# Altium PCB Controller.PcbDoc
Units mm, origin at the board's own origin, x right, y up, seen from the top; angles counter-clockwise.
Board outline 152.4 x 101.6 mm, 2 copper layers (Top Layer, Bottom Layer); 32 components, 49 nets, 164 pads, 0 vias.
Unrouted connection lines stored in the file: 99.
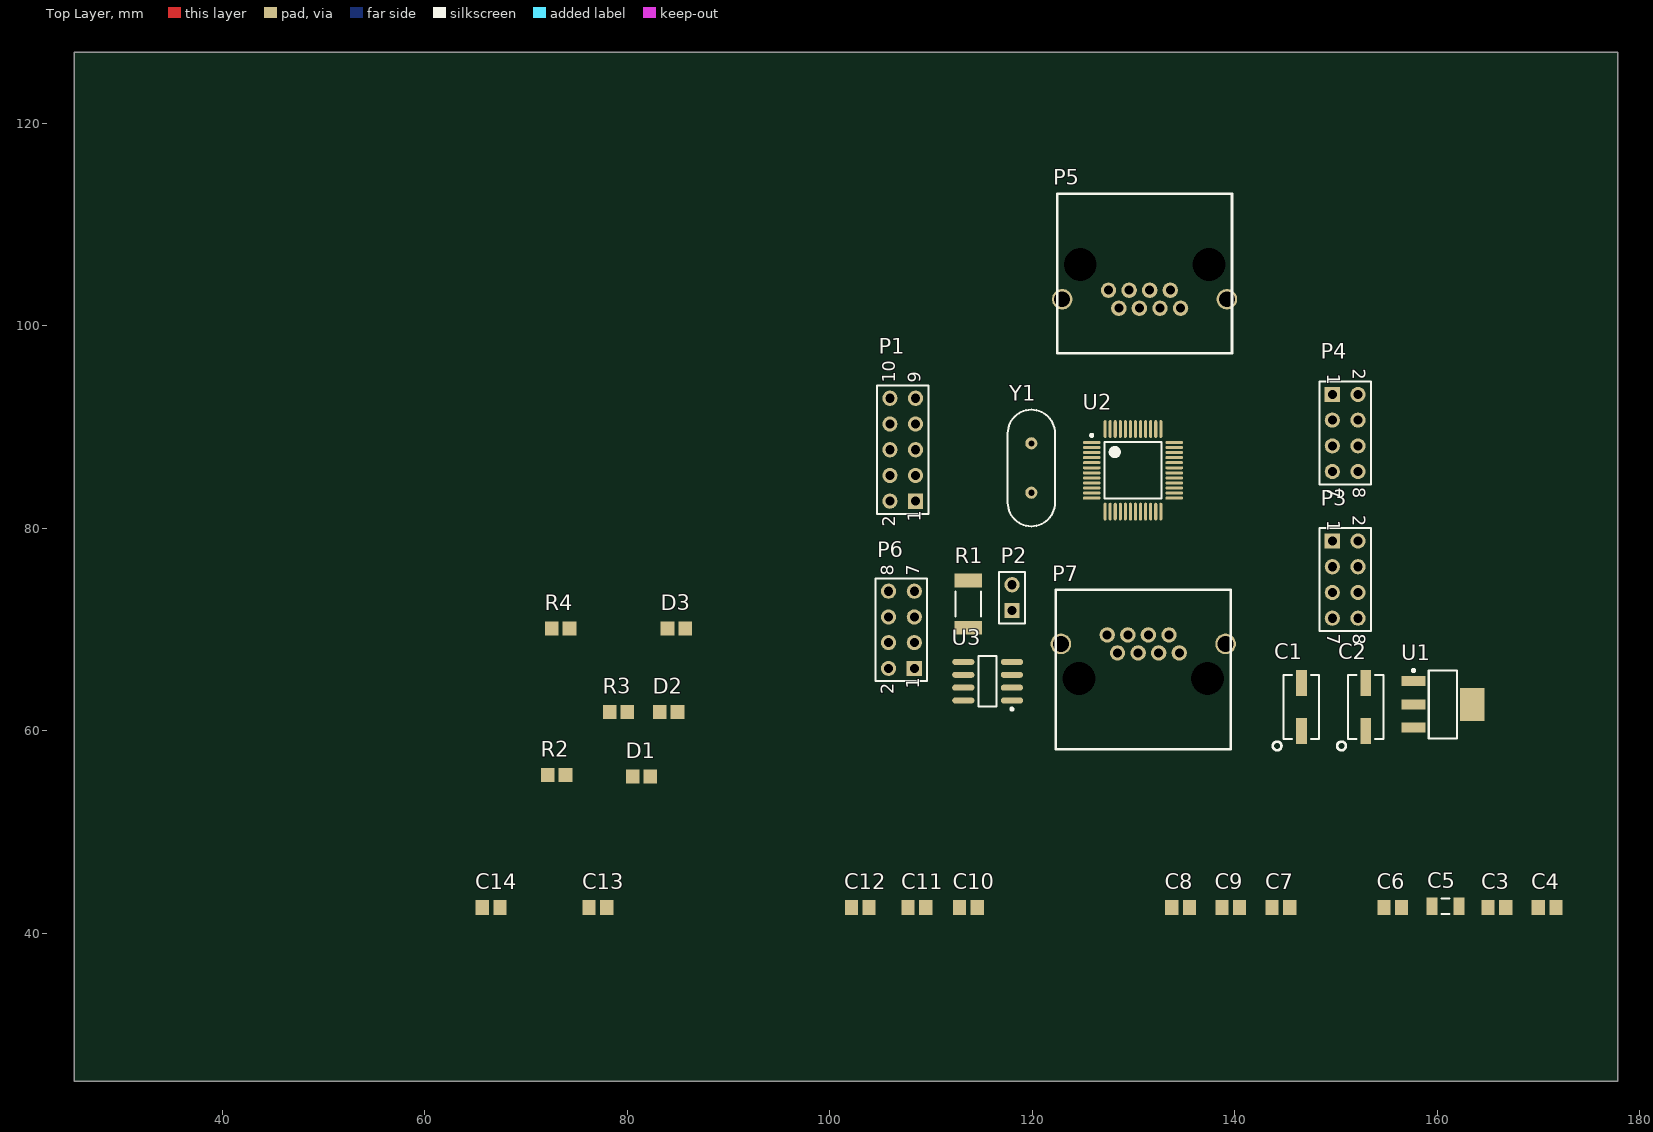
[diagram p0: Top Layer view]
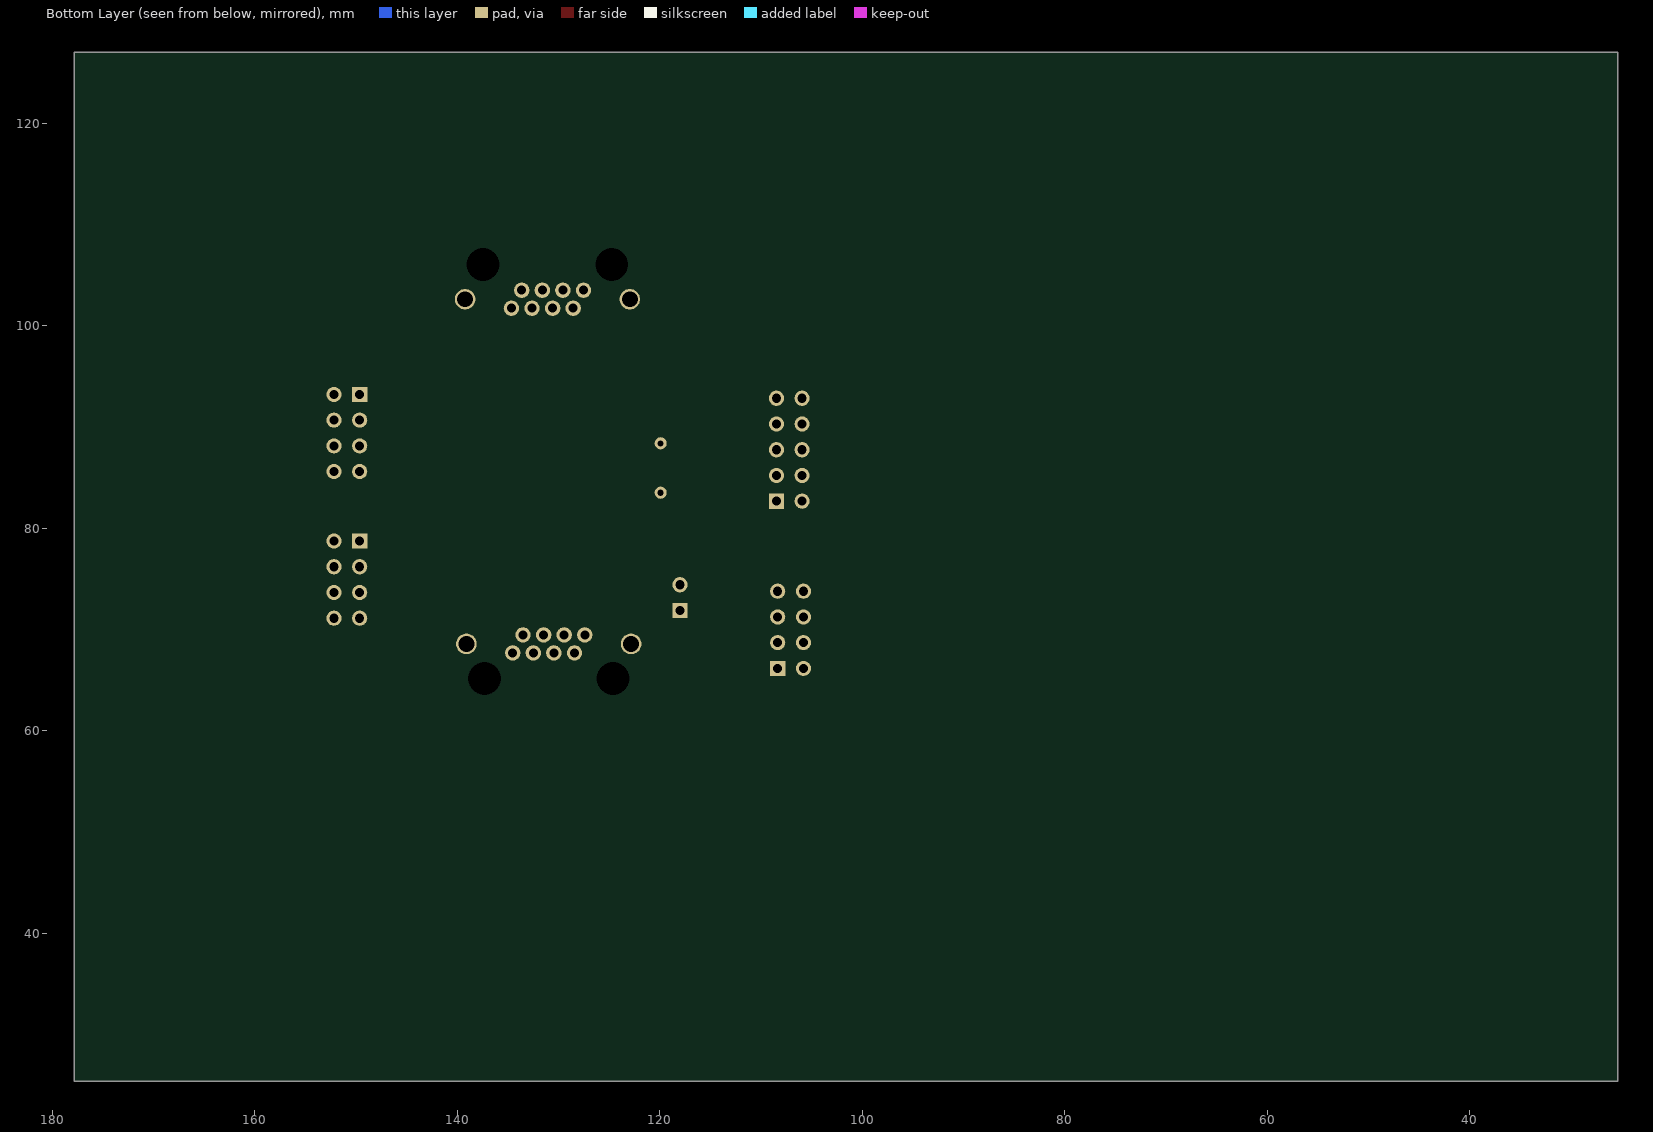
[diagram p1: Bottom Layer view, seen from below]

## Layer stack, top to bottom
Top Layer: signal copper 0.0356
Dielectric: dielectric 0.32, FR-4, Dk 4.8
Bottom Layer: signal copper 0.0356

## Board outline
25.4,25.4 177.8,25.4 177.8,127 25.4,127

## Design rules (kind name [scope] priority, off if disabled: settings)
Clearance [All] p1: gap=0.254
PolygonConnect [All] p1: connectstyle=Relief reliefconductorwidth=0.254 reliefentries=4 polygonreliefangle="90 Angle" airgapwidth=0.254
RoutingVias [All] p1: holewidth=0.711 width=1.27 viastyle="Through Hole" minholewidth=0.711 minwidth=1.27 maxholewidth=0.711 maxwidth=1.27
SolderMaskExpansion [All] p1: expansion=0.102
Width [All] p1: maxlimit=0.254 minlimit=0.254 preferedwidth=0.254
28 further rules are at their usual default settings.

## Components (designator, comment, footprint, x,y, rotation, side; value= is the part's Value field where it differs from the comment)
C1 "Cap Pol3" CAPM6032X28N 146.572,62.357 r90 top
C2 "Cap Pol3" CAPM6032X28N 152.922,62.357 r90 top
C3 "Cap Semi" CAPC2012X14N 165.876,42.545 r0 top
C4 "Cap Semi" CAPC2012X14N 170.829,42.545 r0 top
C5 "Cap Semi" C1206 160.796,42.672 r0 top
C6 "Cap Semi" CAPC2012X14N 155.589,42.545 r0 top
C7 "Cap Semi" CAPC2012X14N 144.54,42.545 r0 top
C8 "Cap Semi" CAPC2012X14N 134.634,42.545 r0 top
C9 "Cap Semi" CAPC2012X14N 139.587,42.545 r0 top
C10 "Cap Semi" CAPC2012X14N 113.679,42.545 r0 top
C11 "Cap Semi" CAPC2012X14N 108.599,42.545 r0 top
C12 "Cap Semi" CAPC2012X14N 103.011,42.545 r0 top
C13 "Cap Semi" CAPC2012X14N 77.103,42.545 r0 top
C14 "Cap Semi" CAPC2012X14N 66.562,42.545 r0 top
D1 "LED3" RESC2012X14N 81.407,55.499 r0 top
D2 "LED3" RESC2012X14N 84.088,61.849 r0 top
D3 "LED3" RESC2012X14N 84.85,70.104 r0 top
P1 "Header 5X2" HDR2X5 108.472,82.677 r90 top
P2 "CAN_TERM" HDR1X2 117.997,71.882 r90 top
P3 "Header 4X2" HDR2X4 149.62,78.74 r270 top
P4 "Header 4X2" HDR2X4 149.62,93.218 r270 top
P5 "RJ45-CAN8" RJ45-CAN 131.205,105.156 r180 top
P6 "Header 4X2" HDR2X4 108.345,66.167 r90 top
P7 "RJ45-CAN8" RJ45-CAN 130.824,66.04 r0 top
R1 "Res3" RESC5025X07N 113.679,72.517 r90 top
R2 "Res3" RESC2012X14N 73.025,55.626 r0 top
R3 "Res3" RESC2012X14N 79.135,61.849 r0 top
R4 "Res3" RESC2012X14N 73.42,70.104 r0 top
U1 "LD1117S33" SOT230P700X180-4N 160.542,62.611 r0 top
U2 "STM32F303" TSQFP50P900X900X160-48N 129.935,85.725 r0 top
U3 "SN65HVD230DR" SOIC127P600X175-8N 115.584,64.897 r180 top
Y1 "XTAL" HC49/US 119.902,88.392 r270 top

## Footprints (in the part's own frame and the unit in brackets; to place one, negate y for a bottom-side part, rotate by r counter-clockwise, add the part's x,y. Pads: shape width x height; smd on the part's side, far side on the other; paste and mask are expansions set on the pad)
C1206 [mm] "Chip Capacitor, Body 3.2x1.6mm, IPC High Density"
  rect 1.1x1.7 smd: 1(-1.35,0) 2(1.35,0)
  silkscreen extent -0.4,-0.75 0.4,0.75, body extent -1.7,-0.9 1.7,0.9, height 1.3
CAPC2012X14N [mm] "Chip Capacitor, 2-Leads, Body 2.00x1.25mm, IPC Medium Density"
  rect 1.3x1.5 smd: 1(-0.875,0) 2(0.875,0)
  body extent -1.1,-0.72 1.1,0.72, height 1.4
CAPM6032X28N [mm] "Molded Capacitor, 2-Leads, Body 6.00x3.20mm, IPC Medium Density"
  rect 2.55x1.05 smd: 1(-2.375,0) 2(2.375,0)
  silkscreen extent -4.28,-1.75 3.15,2.83, body extent -3.15,-1.75 3.15,1.75, height 2.8
HC49/US [mm]
  round 1.2 hole 0.6: 1(0,0) 2(4.88,0)
  silkscreen extent -3.32,-2.33 8.2,2.33
HDR1X2 [mm] "Connector; Header; 2 Position"
  rect 1.5x1.5 hole 0.9: 1(0,0)
  round 1.5 hole 0.9: 2(2.54,0)
  silkscreen extent -1.27,-1.27 3.81,1.27
HDR2X4 [mm] "Connector; Header; 4x2 Position"
  rect 1.5x1.5 hole 0.9: 1(0,0)
  round 1.5 hole 0.9: 2(0,2.54) 3(2.54,0) 4(2.54,2.54) 5(5.08,0) 6(5.08,2.54) 7(7.62,0) 8(7.62,2.54)
  silkscreen extent -1.27,-1.27 8.89,3.81
HDR2X5 [mm] "Connector; Header; 5x2 Position"
  rect 1.5x1.5 hole 0.9: 1(0,0)
  round 1.5 hole 0.9: 2(0,2.54) 3(2.54,0) 4(2.54,2.54) 5(5.08,0) 6(5.08,2.54) 7(7.62,0) 8(7.62,2.54) 9(10.16,0) 10(10.16,2.54)
  silkscreen extent -1.27,-1.27 11.43,3.81
RESC2012X14N [mm] "Chip Resistor, 2-Leads, Body 2.00x1.25mm, IPC Medium Density"
  rect 1.35x1.4 smd: 1(-0.875,0) 2(0.875,0)
  body extent -1.1,-0.72 1.1,0.73, height 1.4
RESC5025X07N [mm] "Chip Resistor, 2-Leads, Body 5.00x2.50mm, IPC Medium Density"
  rect 1.35x2.7 smd: 1(-2.325,0) 2(2.325,0)
  silkscreen extent -1.25,-1.25 1.25,1.25, body extent -2.57,-1.33 2.58,1.32, height 0.7
RJ45-CAN [mil]
  round 60 hole 35: 1(145,65) 2(105,135) 3(65,65) 4(25,135) 5(-15,65) 6(-55,135) 7(-95,65) 8(-135,135)
  round 80 hole 62: 9(-315,100) 9(325,100)
  round 0 hole 128: 10(-245,-35)
  round 0 hole 128 unplated: 10(255,-35)
  silkscreen extent -335,-310 345,310
SOIC127P600X175-8N [mm] "SOIC, 8-Leads, Body 4.90x3.90mm, Pitch 1.27mm, IPC Medium Density"
  oval 2.2x0.6 smd: 1(-2.4,1.905) 2(-2.4,0.635) 3(-2.4,-0.635) 4(-2.4,-1.905) 5(2.4,-1.905) 6(2.4,-0.635) 7(2.4,0.635) 8(2.4,1.905)
  silkscreen extent -2.53,-2.5 0.9,2.88, body extent -2,-2.5 2,2.5, height 1.75
SOT230P700X180-4N [mm] "SOT223, 4-Leads, Body 6.50x7.00mm (avg), Pitch 2.30mm, IPC Medium Density"
  rect 2.4x1 smd: 1(-2.9,2.3) 2(-2.9,0) 3(-2.9,-2.3)
  rect 2.4x3.25 smd: 2(2.9,0)
  silkscreen extent -3.02,-3.35 1.4,3.47, body extent -1.85,-3.35 1.85,3.35, height 1.8
TSQFP50P900X900X160-48N [mm] "TSQFP, 48-Leads, Body 7.00x7.00mm, Pitch 0.50mm, IPC Medium Density"
  oval 1.75x0.3 smd: 1(-4.075,2.75) 2(-4.075,2.25) 3(-4.075,1.75) 4(-4.075,1.25) 5(-4.075,0.75) 6(-4.075,0.25) 7(-4.075,-0.25) 8(-4.075,-0.75) 9(-4.075,-1.25) 10(-4.075,-1.75) 11(-4.075,-2.25) 12(-4.075,-2.75) 25(4.075,-2.75) 26(4.075,-2.25) 27(4.075,-1.75) 28(4.075,-1.25) 29(4.075,-0.75) 30(4.075,-0.25) 31(4.075,0.25) 32(4.075,0.75) 33(4.075,1.25) 34(4.075,1.75) 35(4.075,2.25) 36(4.075,2.75)
  oval 0.3x1.75 smd: 13(-2.75,-4.075) 14(-2.25,-4.075) 15(-1.75,-4.075) 16(-1.25,-4.075) 17(-0.75,-4.075) 18(-0.25,-4.075) 19(0.25,-4.075) 20(0.75,-4.075) 21(1.25,-4.075) 22(1.75,-4.075) 23(2.25,-4.075) 24(2.75,-4.075) 37(2.75,4.075) 38(2.25,4.075) 39(1.75,4.075) 40(1.25,4.075) 41(0.75,4.075) 42(0.25,4.075) 43(-0.25,4.075) 44(-0.75,4.075) 45(-1.25,4.075) 46(-1.75,4.075) 47(-2.25,4.075) 48(-2.75,4.075)
  silkscreen extent -4.2,-2.8 2.8,3.57, body extent -3.5,-3.5 3.5,3.5, height 1.6

## Part data
C1 C2: "Polarized Capacitor (Surface Mount)"
C3 C4 C5 C6 C7 C8 C9 C10 C11 C12 C13 C14: "Capacitor (Semiconductor SIM Model)"
D1 D2 D3: "Typical BLUE SiC LED"
P1: "Header, 5-Pin, Dual row"
P2: library part "Header 2", "Header, 2-Pin"
P3 P4 P6: "Header, 4-Pin, Dual row"
R1 R2 R3 R4: "Resistor"
Y1: "Crystal Oscillator"

## Nets (pads, with @x,y where several pads share a name; then routed paths per layer and width w, separated by ;. In a path a pad name is that pad's centre, name@x,y a point inside that pad or via, vN(x,y) a via of type N, cw(c..) or ccw(c..) an arc to the next point about the centre after c; other vN are vias at no path point)
5V: C1.1 C3.2 P5.3 P7.3 U1.3
12V: P5.1 P7.1
CAN_RX: U2.45 U3.4
CAN_TX: U2.46 U3.1
CANH: P5.5 P7.5 R1.2 U3.7
CANL: P2.1 P5.4 P7.4 U3.6
GND: C1.2 C2.2 C3.1 C4.1 C5.2 C6.1 C7.1 C8.1 C9.1 C10.1 C11.1 C12.1 C13.1 C14.1 P1.4 P1.6 P1.8 P1.10 P3.2 P3.4 P3.6 P3.8 P4.2 P4.4 P4.6 P4.8 P5.7 P6.2 P6.4 P6.6 P6.8 P7.7 R2.2 R3.2 R4.2 U1.1 U2.8 U2.23 U2.35 U2.44 U2.47 U3.2
NetC8_2: C8.2 U2.5 Y1.1
NetC9_2: C9.2 U2.6 Y1.2
NetD1_2: D1.2 R2.1
NetD2_2: D2.2 R3.1
NetD3_2: D3.2 R4.1
NetP2_2: P2.2 R1.1
NRST: C5.1 P1.2 U2.7
PA0: P4.1 U2.10
PA1: P4.3 U2.11
PA2: P4.5 U2.12
PA3: P4.7 U2.13
PA4: P6.1 U2.14
PA5: P6.3 U2.15
PA6: P6.5 U2.16
PA7: P6.7 U2.17
PA8: U2.29
PA9: P3.7 U2.30
PA10: P3.5 U2.31
PA11: P3.3 U2.32
PA12: P3.1 U2.33
PA13: P1.3 P1.9 U2.34
PA14: P1.5 U2.37
PA15: U2.38
PB0: U2.18
PB1: U2.19
PB2: U2.20
PB3: P1.7 U2.39
PB4: U2.40
PB5: U2.41
PB6: U2.42
PB7: U2.43
PB10: U2.21
PB11: U2.22
PB12: U2.25
PB13: U2.26
PB14: D3.1 U2.27
PB15: D2.1 U2.28
PC13: U2.2
PC14: U2.3
PC15: U2.4
VCC: D1.1 P1.1
VDD: C2.1 C4.2 C6.2 C7.2 C10.2 C11.2 C12.2 C13.2 C14.2 U1.2 U2.1 U2.9 U2.24 U2.36 U2.48 U3.3
pads on no net: P5.2 P5.6 P5.8 P5.9 P5.10 P7.2 P7.6 P7.8 P7.9 P7.10 U3.5 U3.8

## Text inside footprints (layer, text, board x,y; h text height)
P1: Top Overlay "10" at 106.44,94.361 h1.27 r90; Top Overlay "9" at 108.98,94.361 h1.27 r90; Top Overlay "1" at 108.98,80.645 h1.27 r90; Top Overlay "2" at 106.44,80.137 h1.27 r90
P3: Top Overlay "2" at 151.652,81.28 h1.27 r270; Top Overlay "1" at 149.112,80.772 h1.27 r270; Top Overlay "7" at 149.112,69.596 h1.27 r270; Top Overlay "8" at 151.652,69.596 h1.27 r270
P4: Top Overlay "2" at 151.652,95.758 h1.27 r270; Top Overlay "1" at 149.112,95.25 h1.27 r270; Top Overlay "7" at 149.112,84.074 h1.27 r270; Top Overlay "8" at 151.652,84.074 h1.27 r270
P6: Top Overlay "2" at 106.313,63.627 h1.27 r90; Top Overlay "1" at 108.853,64.135 h1.27 r90; Top Overlay "7" at 108.853,75.311 h1.27 r90; Top Overlay "8" at 106.313,75.311 h1.27 r90